# Altium PCB pcb_2Layer.PcbDoc
Units mm, origin at the board's own origin, x right, y up, seen from the top; angles counter-clockwise.
Board outline 113 x 60 mm, 2 copper layers (Top Layer, Bottom Layer), stack 1.576 mm thick; 38 components, 20 nets, 113 pads, 0 vias.
Unrouted connection lines stored in the file: 79.
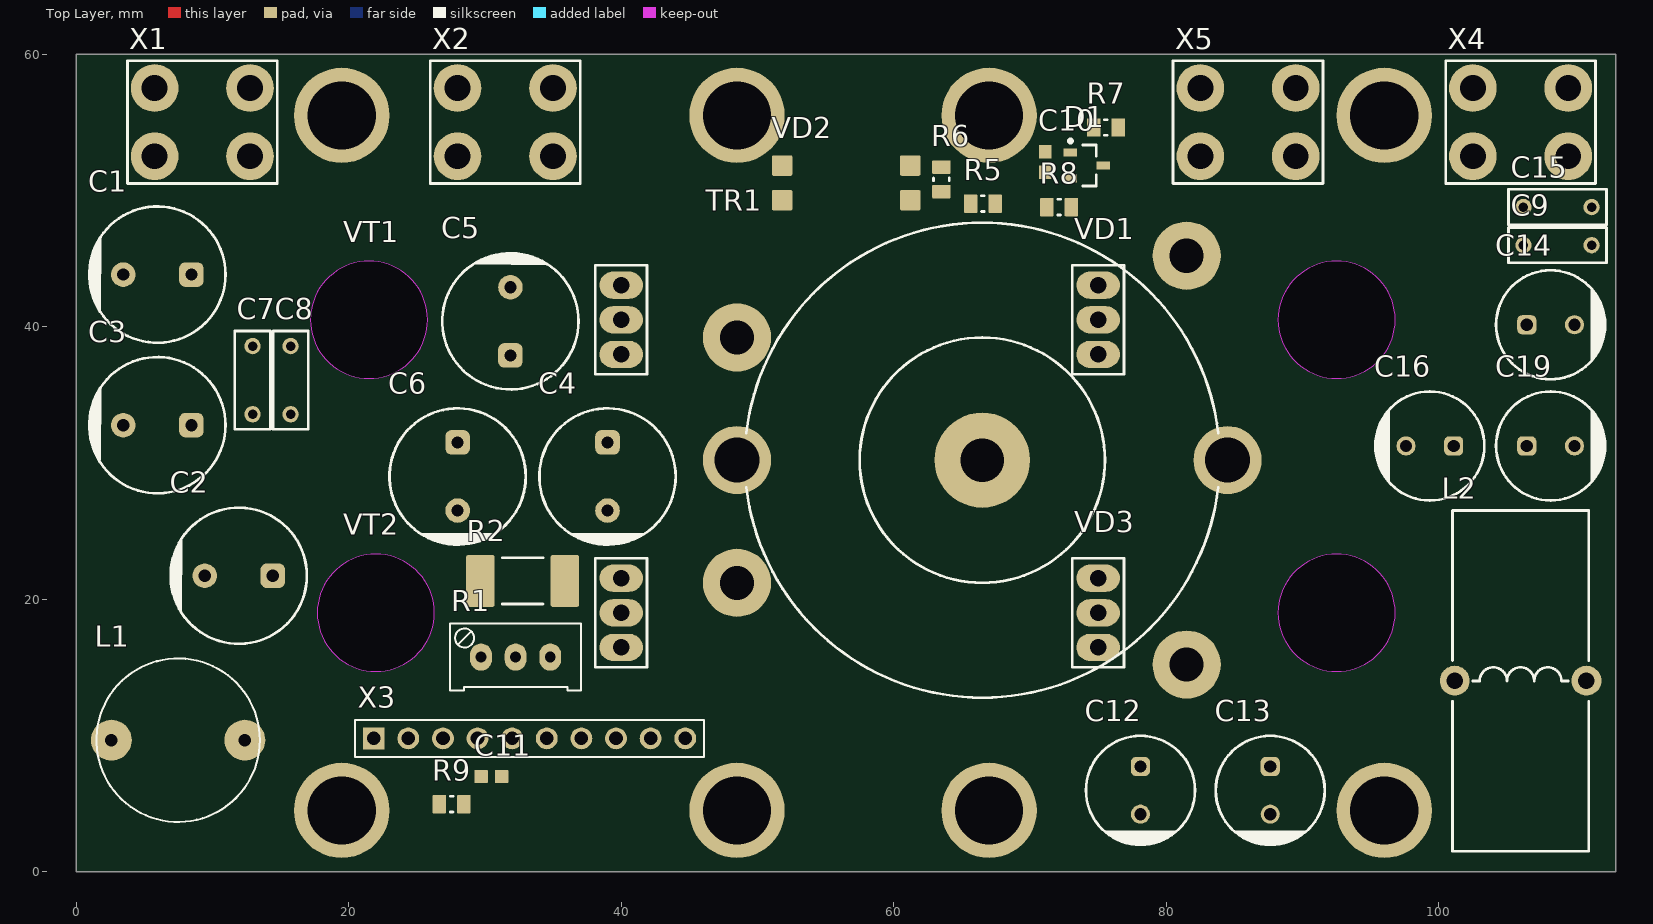
[diagram p0: Top Layer view]
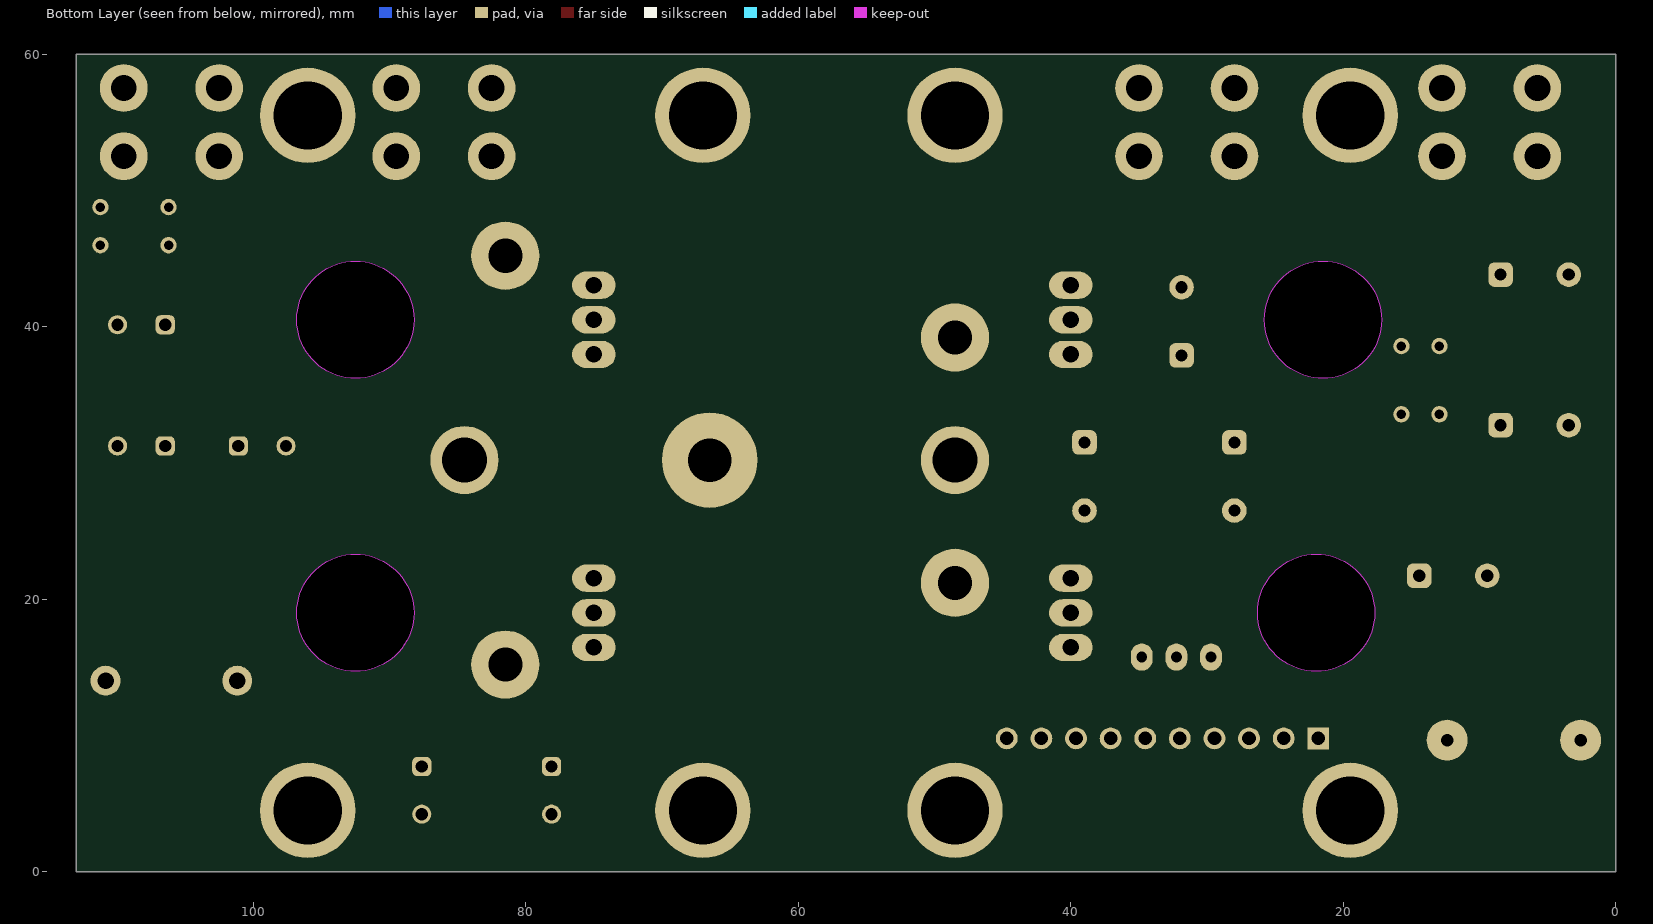
[diagram p1: Bottom Layer view, seen from below]

## Layer stack, top to bottom
Top Solder: solder mask 0.012, Solder Resist, Dk 3.5
Top Layer: signal copper 0.038
Dielectric 1: dielectric 1.5, FR-4, Dk 4.8
Bottom Layer: signal copper 0.038
Bottom Solder: solder mask 0.012, Solder Resist, Dk 3.5

## Board outline
0,0 0,60 113,60 113,0
cut-out: 17.199,40.5 ccw(c21.5,40.5) 21.5,36.199 ccw(c21.5,40.5) 25.801,40.5 ccw(c21.5,40.5) 21.5,44.801 ccw(c21.5,40.5)
cut-out: 17.699,19 ccw(c22,19) 22,14.699 ccw(c22,19) 26.301,19 ccw(c22,19) 22,23.301 ccw(c22,19)
cut-out: 88.199,19 ccw(c92.5,19) 92.5,14.699 ccw(c92.5,19) 96.801,19 ccw(c92.5,19) 92.5,23.301 ccw(c92.5,19)
cut-out: 88.199,40.5 ccw(c92.5,40.5) 92.5,36.199 ccw(c92.5,40.5) 96.801,40.5 ccw(c92.5,40.5) 92.5,44.801 ccw(c92.5,40.5)

## Design rules (kind name [scope] priority, off if disabled: settings)
BoardOutlineClearance [All] p1: gap=0.5 ignorepadtopadclearanceinfootprint=FALSE
Clearance MiddleVoltage [InNetClass('MiddleVoltage')] p1: gap=0.5 ignorepadtopadclearanceinfootprint=FALSE except(0: Arc-Hole Track-Hole SMDPad-Hole THPad-Hole Via-Hole Fill-Hole Poly-Hole Region-Hole Text-Hole; 0.2: Arc-Text Track-Text SMDPad-Text THPad-Text Via-Text Fill-Text Poly-Text Region-Text Text-Text)
Clearance HighVoltage [InNetClass('HighVoltage')] p2: gap=1 ignorepadtopadclearanceinfootprint=FALSE except(0: Arc-Hole Track-Hole SMDPad-Hole THPad-Hole Via-Hole Fill-Hole Poly-Hole Region-Hole Text-Hole; 0.2: Arc-Text Track-Text SMDPad-Text THPad-Text Via-Text Fill-Text Poly-Text Region-Text Text-Text)
Clearance Standart [All] p3: gap=0.2 ignorepadtopadclearanceinfootprint=FALSE except(0: Arc-Hole Track-Hole SMDPad-Hole THPad-Hole Via-Hole Fill-Hole Poly-Hole Region-Hole Text-Hole)
ComponentClearance [All] p1: gap=0.1 collisioncheckmode=3 verticalgap=0.1 showdistances=TRUE
Height [All] p1: minheight=0 maxheight=40 prefheight=12.7
HoleSize [All] p1: absolutevalues=TRUE maxlimit=12 minlimit=0.3 maxpercent=80.000 minpercent=20.000
HoleToHoleClearance [All] p1: gap=0.3 allowstackedmicrovias=TRUE
MinimumSolderMaskSliver [All] p1: minsoldermaskwidth=0.1
NetAntennae [All] p1: netantennaetolerance=2
PlaneClearance [All] p1: clearance=0.3
PlaneConnect PlaneConnectMiddleCurrent [InNetClass('MiddleCurrent')] p1: planeconnectstyle=Relief reliefexpansion=0.508 reliefentries=4 reliefconductorwidth=0.5 reliefairgap=0.3
PlaneConnect PlaneHighCurrent [InNetClass('HighCurrent')] p2: planeconnectstyle=Relief reliefexpansion=0.508 reliefentries=4 reliefconductorwidth=0.5 reliefairgap=0.35
PlaneConnect [All] p3: planeconnectstyle=Relief reliefexpansion=0.508 reliefentries=4 reliefconductorwidth=0.3 reliefairgap=0.3
PolygonConnect PolygonConnectMiddleCurrent [All vs InNetClass('MiddleCurrent')] p1: connectstyle=Relief reliefconductorwidth=0.4 reliefentries=4 polygonreliefangle="90 Angle" airgapwidth=0.3
PolygonConnect PolygonHighCurrent [InNetClass('HighCurrent')] p2: connectstyle=Relief reliefconductorwidth=0.5 reliefentries=4 polygonreliefangle="90 Angle" airgapwidth=0.3
PolygonConnect PolygonConnect_Keepout [(ObjectKind = 'Track') And (Layer = 'KeepOutLayer')] p3: connectstyle=Direct reliefconductorwidth=0.254 reliefentries=4 polygonreliefangle="90 Angle" airgapwidth=0.254
PolygonConnect PolygonConnect_Via [IsVia] p4: connectstyle=Direct reliefconductorwidth=0.254 reliefentries=4 polygonreliefangle="90 Angle" airgapwidth=0.254
PolygonConnect [All] p5: thpad.connectstyle=Relief thpad.reliefconductorwidth=0.3 thpad.reliefentries=4 thpad.polygonreliefangle="90 Angle" thpad.airgapwidth=0.25 smdpad.connectstyle=Relief smdpad.reliefconductorwidth=0.3 smdpad.reliefentries=4 smdpad.polygonreliefangle="90 Angle" smdpad.airgapwidth=0.25 via.connectstyle=Direct via.reliefconductorwidth=0.3 via.reliefentries=4 via.polygonreliefangle="90 Angle" via.airgapwidth=0.3
RoutingCorners [All] p1: cornerstyle=45-Degree minsetback=1 maxsetback=3
RoutingVias Power [InNetClass('Power')] p1: holewidth=0.8 width=1.5 viastyle="Through Hole" minholewidth=0.5 minwidth=1 maxholewidth=1.2 maxwidth=3
RoutingVias [All] p2: holewidth=0.4 width=0.8 viastyle="Through Hole" minholewidth=0.3 minwidth=0.6 maxholewidth=0.5 maxwidth=1
SilkToSilkClearance [All] p1: silktosilkclearance=0
SilkToSolderMaskClearance [IsPad] p1: minsilkscreentomaskgap=0.05 clearancetoexposedcopper=TRUE
SolderMaskExpansion SolderMaskExpansion_VIA [IsVia] p1: expansion=-3 istentingtop=TRUE useseparateexpansions=TRUE expansionbottom=-3 istentingbottom=TRUE
SolderMaskExpansion [All] p2: expansion=0.05 istentingtop=FALSE
SupplyNets "Schematic Supply Nets_7" [InNet('GND16')] p1: voltage=0.000
SupplyNets "Schematic Supply Nets_6" [InNet('+VBAT')] p2: voltage=0.000
SupplyNets "Schematic Supply Nets_5" [InNet('5VREF')] p3: voltage=0.000
SupplyNets "Schematic Supply Nets_2" [InNet('GND')] p4: voltage=0.000
Width Width_ANT [InNetClass('Anthenna')] p1: maxlimit=1.641 minlimit=0.2 preferedwidth=1.641
Width WidthMiddleCurrent [InNetClass('MiddleCurrent')] p2: maxlimit=2 minlimit=0.35 preferedwidth=0.5
Width WidthHighCurrent [InNetClass('HighCurrent')] p3: maxlimit=5 minlimit=0.5 preferedwidth=1
Width [All] p4: maxlimit=0.5 minlimit=0.2 preferedwidth=0.25
19 further rules are at their usual default settings.

## Components (designator, comment, footprint, x,y, rotation, side; value= is the part's Value field where it differs from the comment)
C1 "1000uFx25V" CAP-AE-PTH-100D05x200H20 5.969,43.815 r180 top value=1000uF
C2 "1000uFx25V" CAP-AE-PTH-100D05x200H20 11.938,21.717 r180 top value=1000uF
C3 "1000uFx25V" CAP-AE-PTH-100D05x200H20 5.969,32.766 r180 top value=1000uF
C4 "1000uFx25V" CAP-AE-PTH-100D05x200H20 39,29 r270 top value=1000uF
C5 "1000uFx25V" CAP-AE-PTH-100D05x200H20 31.877,40.386 r90 top value=1000uF
C6 "1000uFx25V" CAP-AE-PTH-100D05x200H20 28,29 r270 top value=1000uF
C7 "*uF" "CAP: MKS2 (W=2.50MM)" 12.954,36.068 r90 top value=0.1uF
C8 "*uF" "CAP: MKS2 (W=2.50MM)" 15.748,36.068 r90 top value=0.1uF
C9 "*uF" "CAP: MKS2 (W=2.50MM)" 108.712,45.974 r0 top value=0.1uF
C10 "0.1uF" C_CERAMIC_0603_MED 71.12,52.07 r270 top
C11 "0.1uF" C_CERAMIC_0603_MED 30.48,6.985 r0 top
C12 "470uFx25V" CAP-AE-PTH-80D05x130H15 78.105,5.969 r270 top value=470uF
C13 "470uFx25V" CAP-AE-PTH-80D05x130H15 87.63,5.969 r270 top value=470uF
C14 "470uFx25V" CAP-AE-PTH-80D05x130H15 108.204,40.132 r0 top value=470uF
C15 "*uF" "CAP: MKS2 (W=2.50MM)" 108.712,48.768 r0 top value=0.1uF
C16 "470uFx25V" CAP-AE-PTH-80D05x130H15 99.342,31.242 r180 top value=470uF
C19 "470uFx25V" CAP-AE-PTH-80D05x130H15 108.204,31.242 r0 top value=470uF
D1 "TL431ACDBZR" SOT-23_MED 74.168,51.816 r0 top
L1 "3.3uH" DROD0625V-18-1.12 7.493,9.652 r0 top value="3.3 uH"
L2 "15uH" "IND: R22.9/14/7.62 (H)" 106,14 r0 top value="15 uH"
R1 "10k" 3296W-1-xxx 32.258,15.748 r270 top
R2 "30mOhm" CRA2512-Series 32.766,21.336 r180 top value=0.03
R5 "1k" R_ANY_CHIP_0805_MED 66.548,49.022 r0 top
R6 "1k" R_ANY_CHIP_0805_MED 63.5,50.8 r270 top
R7 "22" R_ANY_CHIP_0805_MED 75.576,54.61 r0 top value=10k
R8 "2k7" R_ANY_CHIP_0805_MED 72.136,48.768 r180 top
R9 "1k" R_ANY_CHIP_0805_MED 27.559,4.953 r0 top
TR1 "TR" "TR: R32.8/20.1/10.7 (L) - MidPoint - 2" 66.5,30.198 r0 top
VD1 "DIODE SCHOTTKY" TO220(H) 75,40.5 r270 top
VD2 "LTV-817S-TA1" LTV-817S-TA1_REC 56.514,50.546 r90 top
VD3 "DIODE SCHOTTKY" TO220(H) 75,19 r270 top
VT1 "AOD403" TO220(H) 40,40.5 r90 top locked
VT2 "AOD403" TO220(H) 40,19 r90 top locked
X1 "Power connector, *, *" "CON: 8191" 9.271,55 r90 top
X2 "Power connector, *, *" "CON: 8191" 31.496,55 r90 top
X3 "PLS-10 (Part of PLS-40)" DS1021-10S 33.274,9.779 r0 top
X4 "Power connector, *, *" "CON: 8191" 106,55 r90 top
X5 "Power connector, *, *" "CON: 8191" 86,55 r90 top

## Footprints (in the part's own frame and the unit in brackets; to place one, negate y for a bottom-side part, rotate by r counter-clockwise, add the part's x,y. Pads: shape width x height; smd on the part's side, far side on the other; paste and mask are expansions set on the pad)
3296W-1-xxx [mm] "Square Trimpot Trimming Potentiometer"
  oval 2x1.6 hole 0.8 mask+0.05: 1(0,-2.54) 2(0,0) 3(0,2.54)
  silkscreen extent -2.45,-4.8 2.45,4.8, body extent -2.45,-4.76 2.38,4.76, height 11.6
C_CERAMIC_0603_MED [mm] "Chip Capacitor, 2-Leads, Body 1,60x0,80mm, IPC Medium Density"
  rrect15% 1x0.95 smd mask+0.05: 1(-0.75,0) 2(0.75,0)
  Top Layer pour cut-out: -0.05,0.45 0.05,0.45 0.05,-0.45 -0.05,-0.45
  body extent -0.9,-0.5 0.9,0.5, height 0.9
CAP-AE-PTH-80D05x130H15 [mm] "PTH Aluminium Electrolytic Capacitor, Diameter 8mm, Height 13mm"
  rrect50% 1.4x1.4 hole 0.9: 1(-1.75,0)
  round 1.4 hole 0.9: 2(1.75,0)
  silkscreen extent -4,-4 4.03,4, body extent -4.25,-4.25 4.25,4.25, height 14.5
CAP-AE-PTH-100D05x200H20 [mm] "PTH Aluminium Electrolytic Capacitor, Diameter 10mm, Height 20mm"
  rrect50% 1.8x1.8 hole 0.9: 1(-2.5,0)
  round 1.8 hole 0.9: 2(2.5,0)
  silkscreen extent -5,-5 5,5, body extent -5.25,-5.25 5.25,5.25, height 22
"CAP: MKS2 (W=2.50MM)" [mm]
  round 1.2 hole 0.7: 1(-2.5,0) 2(2.5,0)
  silkscreen extent -3.6,-1.3 3.6,1.3, body extent -3.6,-1.25 3.6,1.25, height 6.5
"CON: 8191" [mm]
  round 3.5 hole 1.9: 1(-2.5,3.5) 1(-2.5,-3.5) 1(2.5,3.5) 1(2.5,-3.5)
  silkscreen extent -4.5,-5.5 4.5,5.5, body extent -4,-4 4,4, height 7.05
CRA2512-Series [mm]
  rrect15% 2.1x3.8 smd mask+0.05: 1(-3.1,0) 2(3.1,0)
  silkscreen extent -1.5,-1.7 1.5,1.7, body extent -3.22,-1.68 3.23,1.68, height 0.7
DROD0625V-18-1.12 [mm] "Дросель з магазину Coretech"
  round 3 hole 0.914 paste-2539.97 mask+0: 1(-4.896,0) 2(4.896,0)
  silkscreen extent -6,-6 6,6
DS1021-10S [mm] "2.54mm 10-pin One Row Male Header, PLS-10"
  rect 1.6x1.6 hole 1: 1(-11.43,0)
  round 1.6 hole 1: 2(-8.89,0) 3(-6.35,0) 4(-3.81,0) 5(-1.27,0) 6(1.27,0) 7(3.81,0) 8(6.35,0) 9(8.89,0) 10(11.43,0)
  silkscreen extent -12.8,-1.35 12.8,1.35, body extent -12.7,-1.27 12.7,1.27, height 8.64
"IND: R22.9/14/7.62 (H)" [mm]
  round 2.2 hole 1.2: 1(-4.83,0.015) 2(4.83,0.015)
  silkscreen extent -5,-12.5 5,12.5, body extent -4.83,-12.47 4.83,12.47, height 24.77
LTV-817S-TA1_REC [mm] "SMD Optocoupler 5kV"
  rrect15% 1.5x1.5 smd: 1(-1.27,-4.7) 2(1.27,-4.7) 3(1.27,4.7) 4(-1.27,4.7)
  body extent -2.31,-5.09 2.29,5.07, height 3.76
R_ANY_CHIP_0805_MED [mm] "Chip Resistor, 2-Leads, Body 2,00x1,25mm, IPC Medium Density"
  rrect15% 1x1.35 smd: 1(-0.9,0) 2(0.9,0)
  silkscreen extent -0.1,-0.58 0.1,0.58, body extent -1,-0.67 1,0.68, height 0.6
SOT-23_MED [mm] "SOT23, 3-Leads, Body 2,92x2,37mm, Pitch 0,95mm, IPC Medium Density"
  rrect15% 1x0.6 smd: 1(-1.2,0.95) 2(-1.2,-0.95) 3(1.2,0)
  silkscreen extent -1.32,-1.5 0.7,1.92, body extent -1.32,-1.52 1.32,1.52, height 1.12
TO220(H) [mm]
  oval 2x3.2 hole 1.2: 1(-2.54,0) 2(0,0) 3(2.54,0)
  silkscreen extent -4,-1.9 4,1.9, body extent -4.95,-0.37 4.95,20.67, height 2.76
"TR: R32.8/20.1/10.7 (L) - MidPoint - 2" [mm]
  round 5 hole 2.5: 1(-18,9) 2(-18,-9) 4(15,15) 5(15,-15)
  round 5 hole 3.3: 3(-18,0) 6(18,0)
  round 7 hole 3.2: ""(0,0)
  silkscreen extent -17.31,-17.43 17.31,17.43, body extent -17.43,-17.4 17.43,17.4, height 12.84

## Part data
C1 C2 C3 C4 C5 C6: library part ESH108M025AH4AA, "1000uF 25V ±20% Aluminum Electrolytic Capacitors Radial, 2000 Hrs @ 105°C, 740mA Ripple Current", Dielectric Type=NONE, Manufacturer=Kemet, Package=D10x20mm, Supplier Part Number 1=80-ESH108M025AH4AA, Temperature Range="-40°C ~ 105°C", Tolerance=±20%, Voltage=25V, Ajax_1C_PN=NONE, Ajax_1С_Status="RND Only", Component Status=Released, Component Type=PTH, ComponentLink1Description=Datasheet, ComponentLink1URL=https://eu.mouser.com/datasheet/2/212/KEM_A4005_ESH-1101279.pdf, Part Number=ESH108M025AH4AA, Part Type=Aluminum, Price=NONE, Replacement=NONE, Standard Lead Time="30 Weeks", Supplier 1=Mouser
C7 C8 C9 C15: library part CAP_NON_POLAR_THT, "Multilayer Ceramic Capacitors MLCC - SMD/SMT 10 uF 25 VDC 10% 1206 X7R", Manufacturer=Murata, Package=1206, Part Number=GRM31CR71E106KA12L, Tolerance="10 %", Voltage=25V, Component Type=THT, ComponentLink1Description=Datasheet, ComponentLink1URL=https://eu.mouser.com/datasheet/2/281/1/GRM31CR71E106KA12_01CA-1987921.pdf
C10 C11: library part CL10B104KB8NNNC, "100nF 50V X7R ±10% 0603 Ceramic Capacitor RoHS", Dielectric Type=X7R, Manufacturer="Samsung Electro-Mechanics", Package=0603, Supplier Part Number 1=1276-1000-2-ND, Temperature Range="-55°C ~ 125°C", Tolerance=±10%, Voltage=50V, Ajax_1C_ID=15653, Ajax_1C_PN="100nF 50V X7R 10% 0603 CL10B104KB8NNNC ceramic capacitor SMD", Ajax_1С_Status="Mass Production", Component Status=Released, Component Type=SMD, ComponentLink1Description=Datasheet, ComponentLink1URL=https://media.digikey.com/pdf/Data%20Sheets/Samsung%20PDFs/CL_Series_MLCC_ds.pdf, GUID_1C=28d36f8f-5d05-11e9-ab4e-0050569f2651, Part Number=CL10B104KB8NNNC, Part Type="Ceramic / X7R / 0603", Price=0.00273, Replacement=CL10B104KB8NNND, Standard Lead Time="18 Weeks", Supplier 1=Digi-Key
C12 C13 C14 C16 C19: library part KS-025V471MF130, "470uF 25V ±20% D8x13mm Conductive Polymer Aluminum Solid Capacitor, 2000 Hrs @ 105°C, 4100mA Ripple Current", Dielectric Type=NONE, Manufacturer=Koshin, Package=D8x13mm, Temperature Range="-55°C ~ 105°C", Tolerance=±20%, Voltage=25V, Ajax_1C_ID=45913, Ajax_1C_PN="470uF 25V 20% Low ESR 8x13mm (KS-025V471MF130 - Koshin) Aluminium Capacitors", Ajax_1С_Status="Mass Production", Component Status=Released, Component Type=PTH, ComponentLink1Description=Datasheet, ComponentLink1URL=\\altiumdb.ajax.local\files\Datasheet\Capacitor\KS-Series.pdf, GUID_1C=2652f362-010b-11ed-a361-005056994834, Part Number=KS-025V471MF130, Part Type=Aluminum, Price=0.07, Replacement=NONE
D1: "Adjustable Precision Shunt Regulator, Accuracy 1%,  SOT-23-3", Manufacturer="Texas Instruments", Package=SOT-23, Supplier Part Number 1=296-17328-1-ND, Temperature Range="0°C ~ 70°C", Ajax_1C_ID=6287, Ajax_1C_PN="TL431ACDBZR (SOT-23)", Ajax_1С_Status="Mass Production", Component Status=Released, Component Type=SMD, ComponentLink1Description=Datasheet, ComponentLink1URL=https://www.ti.com/lit/ds/symlink/tl431.pdf, GUID_1C=b426e85d-df70-11e4-9f89-a45d36c4a9e5, Part Number=TL431ACDBZR, Part Type="Voltage Reference", Price=0.046, Replacement=NONE, Standard Lead Time="8 Weeks", Supplier 1=Digi-Key
L1: library part DROD0625V-18-1.12, "Дросель з магазину Coretech", Current=11.3A, Manufacturer="Bourns Inc.", Package=THT, Part Number=RLB0914-3R3ML-ND, Tolerance=±20%, ComponentLink1Description=Datasheet, ComponentLink1URL=https://www.vishay.com/docs/34193/ihlp-4040dz-01.pdf, Saturation Current=11.3A
L2: library part IND_TOROIDAL, Current=11.3A, Manufacturer="Bourns Inc.", Package=THT, Part Number=RLB0914-3R3ML-ND, Saturation Current=14.4, Tolerance=±20%, ComponentLink1Description=Datasheet, ComponentLink1URL=https://www.vishay.com/docs/34193/ihlp-4040dz-01.pdf
R1: library part 3296W-1-103LF, "10 kOhms ±10% Trimmer Resistor, 0.5W, Through Hole 3/8\", 4.83x9.53mm, 10.03mm Height", Manufacturer=Bourns, Package=4.83x9.53mm, Power Rating=0.5W, Supplier Part Number 1=652-3296W-1-103LF, Temperature Range="-55°C ~ 125°C", Temperature Stability=±100ppm/°C, Tolerance=±10%, Ajax_1C_ID=93647, Ajax_1C_PN="3296W-1-103LF 10k 10% потенціометр Bourns", Ajax_1С_Status="RND Only", Component Status=Released, Component Type=PTH, ComponentLink1Description=Datasheet, ComponentLink1URL=https://www.bourns.com/data/global/pdfs/3296.pdf, GUID_1C=97641684-c416-11ee-b96d-00505699fadc, Part Number=3296W-1-103LF, Part Type="Trimming Potentiometer", Price=0.17925015, Replacement=NONE, Supplier 1=Mouser
R2: library part CRA2512-FZ-R030ELF, "30 mOhms ±1%, 3W 2512 Metal Strip Current Sense Chip Resistor", Manufacturer=Bourns, Package=2512, Power Rating=3W, Supplier Part Number 1=652-CRA2512FZR030ELF, Temperature Range="-55°C ~ 170°C", Temperature Stability=±50ppm/°C, Tolerance=±1%, Voltage=NONE, Ajax_1C_ID=49526, Ajax_1C_PN="0.03R 1% 3W 2512 50ppm CRA2512-FZ-R030ELF Bourns Metal Strip Current Sense Resistors SMD RoHS", Ajax_1С_Status="RND Only", Component Status=Released, Component Type=SMD, ComponentLink1Description=Datasheet, ComponentLink1URL=https://eu.mouser.com/datasheet/2/54/cra-1862173.pdf, GUID_1C=1387118b-2e85-11ed-a363-005056994834, Part Number=CRA2512-FZ-R030ELF, Part Type="Metal Element, Strip", Price=0.199, Replacement=NONE, Supplier 1=Mouser
R5 R6 R7 R8 R9: library part RC0805JR-0722RL, "22 Ohms ±5%, 1/8W 0805 Thick Film Resistor", Manufacturer=Yageo, Package=0805, Power Rating=0.125W, Temperature Range="-55°C ~ 155°C", Temperature Stability=±100ppm/°C, Tolerance=±5%, Voltage=150V, Ajax_1C_ID=8822, Ajax_1C_PN="22R 5% 0805 Resistors SMD RoHS", Ajax_1С_Status="Mass Production", Component Status=Released, Component Type=SMD, ComponentLink1Description=Datasheet, ComponentLink1URL=https://eu.mouser.com/datasheet/2/447/PYu_RC_Group_51_RoHS_L_10-1664068.pdf, GUID_1C=3ba40fec-5951-11e6-81ec-d8cb8a9acc66, Part Number=RC0805JR-0722RL, Part Type="Thick Film", Price=0.0011, Replacement=NONE
TR1: library part "Toroidal Transformator Midpoint_1", Manufacturer=Handmade, Part Number=RLB0914-3R3ML-ND, Saturation Current=11.3A, Tolerance=±20%, ComponentLink1Description=Datasheet, ComponentLink1URL=https://www.vishay.com/docs/34193/ihlp-4040dz-01.pdf
VD1 VD3: "Diode Schottky Array 1 Pair Common Cathode, 120V 20A, TO-220", Current=20A, Manufacturer=STMicroelectronics, Package=TO-220AB, Part Number=STPS20SM120ST, Supplier Part Number 1=497-15563-5-ND, Temperature Range="-65°C ~ 150°C", Voltage=120V, Component Status=Released, Component Type=PTH, ComponentLink1Description=Datasheet, ComponentLink1URL=https://www.st.com/resource/en/datasheet/stps20sm120s.pdf, Marking=STPS20SM120, Part Type=Schottky, Price=NONE, Replacement=NONE, Standard Lead Time="11 Weeks", Supplier 1=Digi-Key, Vf="0.75V @ 10A"
VD2: "1-Channel Photocoupler, 5kV, SSOP-4", Color=NONE, Manufacturer="Lite-On Optoelectronics", Package=SSOP-4, Supplier Part Number 1=160-1893-2-ND, Temperature Range="-55°C ~ 110°C", Ajax_1C_ID=12260, Ajax_1C_PN="LTV-817S-TA1 оптопара", Ajax_1С_Status="Mass Production", Component Status=Released, Component Type=SMD, ComponentLink1Description=Datasheet, ComponentLink1URL=https://optoelectronics.liteon.com/upload/download/DS-70-96-0016/LTV-8X7%20series%20201610%20.pdf, GUID_1C=36a51d61-3103-11e8-822a-14dda9d2d04d, Part Number=LTV-817S-TA1, Part Type=Optocoupler, Price=0.053, Replacement=LTV-816S-TA1, Supplier 1=Digi-Key, Wavelength=NONE
VT1 VT2: library part N-CH_MOSFET, "P-MOSFET; полевой; -30В; -55А; 45Вт; TO252", Package=D-PAK, Component Type=SMD, ComponentLink1Description=Datasheet, ComponentLink1URL=https://www.tme.eu/Document/dd9e9fcbccf7c5b1f5f9da06cbc5bf44/AOD403-DTE.pdf, ComponentLink2Description=imrad, ComponentLink2URL=https://imrad.com.ua/ua/aod403-7?srsltid=AfmBOoqbv76D2b_UWMskTCTCmXEIhcjdT6a5VOgt9k0M-VKdEIqWTw9d, Id=-55А, Part Number=AOD403, Part Type=P-Channel, RDS=8mR, Vds=-30V
X1 X2 X4 X5: library part Connector_single_power, TypeConnector="Power connector", ValueManufacturerPartNumber="Power connector, *, *"
  X1 X4: CommentText=+
  X2 X5: CommentText=-
X3: library part DS1021-10SF11, "10 Pin 2.54mm Male Header, Vertical, 3mm and 6.1mm, PLS-5", Manufacturer=Connfly, Temperature Range="-40°C ~ 105°C", Ajax_1C_ID=1215, Ajax_1C_PN="PLS40, планки со штырьками", Ajax_1С_Status="Mass Production", Component Status=Released, Component Type=PTH, ComponentLink1Description=Datasheet, ComponentLink1URL=\\altiumdb.ajax.local\files\Datasheet\Connectors\DS1021.pdf, Part Number=DS1021-10SF11, Part Type="Header / Male Pin / Single Row", Price=0.001875, Replacement=NONE

## Free pads (board coordinates)
  round 7 hole 5: 1(19.5,4.5) 1(19.5,55.5) 1(48.5,4.5) 1(48.5,55.5) 1(67,4.5) 1(67,55.5) 1(96,4.5) 1(96,55.5)

## Nets (pads, with @x,y where several pads share a name; then routed paths per layer and width w, separated by ;. In a path a pad name is that pad's centre, name@x,y a point inside that pad or via, vN(x,y) a via of type N, cw(c..) or ccw(c..) an arc to the next point about the centre after c; other vN are vias at no path point)
5VREF: R9.2 X3.8
+VBAT: C2.1 C4.1 C5.1 C6.1 C7.1 C8.1 L1.2 TR1.3 X3.1
cEN: X3.2
COMP: R9.1 VD2.4 X3.3
G1: VT1.1 X3.6
G2: VT2.1 X3.7
GND: C1.2 C2.2 C3.2 C4.2 C5.2 C6.2 C7.2 C8.2 C11.2 R1.1 R2.2 VD2.3 X2.1 X3.5 X3.9 X3.10
GND16: C9.2 C12.2 C13.2 C14.2 C15.2 C16.2 C19.2 D1.3 R8.1 TR1.6 X4.1
NetC1_1: C1.1 C3.1 L1.1 X1.1
NetC9_1: C9.1 C14.1 C15.1 C16.1 C19.1 L2.2 R5.2 R7.2 X5.1
NetC10_1: C10.1 D1.1 R6.1 VD2.2
NetC10_2: C10.2 D1.2 R7.1 R8.2
NetC12_1: C12.1 C13.1 L2.1 VD1.2 VD3.2
NetR1_3: R1.3 R2.1 VT1.3 VT2.3
NetR5_1: R5.1 R6.2 VD2.1
NetTR1_1: TR1.1 VT1.2
NetTR1_2: TR1.2 VT2.2
NetTR1_4: TR1.4 VD1.1 VD1.3
NetTR1_5: TR1.5 VD3.1 VD3.3
SHDN: C11.1 R1.2 X3.4
pads on no net: TR1.

## Silkscreen, mask and mechanical layers (free items; w line width, h text height)
Board:
  circle w0.254: c21.5,40.5 r4.301
  circle w0.254: c22,19 r4.301
  circle w0.254: c92.5,19 r4.301
  circle w0.254: c92.5,40.5 r4.301
  lines w0.254: 0,0 0,60 113,60 113,0 0,0
Top Assembly:
  lines w0.5: 9.5,0 52.5,0 52.5,60 9.5,60 9.5,0 ; 57,0 100,0 100,60 57,60 57,0
Title:
  lines w0.1: 198.8,199.4 266.75,199.4
  lines w0.127: -44.879,10.002 -39.799,10.002 ; -44.879,80.487 -39.799,80.487 ; -44.879,150.972 -39.799,150.972 ; 4.397,-60.483 4.397,-55.403 ; 4.397,216.377 4.397,221.457 ; 53.546,-60.483 53.546,-55.403 ; 53.546,216.377 53.546,221.457 ; 102.695,-60.483 102.695,-55.403 ; 102.695,216.377 102.695,221.457 ; 151.971,-60.483 151.971,-55.403 ; 151.971,216.377 151.971,221.457 ; 194.725,-55.375 194.725,-25.375 343.725,-25.375 ; 194.725,-50.375 343.725,-50.375 ; 194.725,-45.375 343.725,-45.375 ; 194.725,-35.375 343.725,-35.375 ; 201.12,-60.483 201.12,-55.403 ; 201.12,216.377 201.12,221.457 ; 209.725,-45.375 209.725,-35.375 ; 250.269,-60.483 250.269,-55.403 ; 250.269,216.377 250.269,221.457 ; 279.725,-55.375 279.725,-45.375 ; 299.545,-60.483 299.545,-55.403 ; 299.545,216.377 299.545,221.457 ; 328.725,-45.375 328.725,-35.375 ; 343.741,10.002 348.821,10.002 ; 343.741,80.487 348.821,80.487 ; 343.741,150.972 348.821,150.972 ; -44.879,-60.483 348.821,-60.483 348.821,221.457 -44.879,221.457 -44.879,-60.483 ; -39.799,-55.403 343.741,-55.403 343.741,216.377 -39.799,216.377 -39.799,-55.403
  text "1" at -20.842,218.028 h1.78
  text "2" at 28.197,218.028 h1.78
  text "3" at 77.456,218.028 h1.78
  text "4" at 126.749,218.028 h1.78
  text "5" at 176.025,218.028 h1.78
  text "6" at 225.047,218.028 h1.78
  text "7" at 274.577,218.028 h1.78
  text "8" at 323.599,218.028 h1.78
  text "NOTES: UNLESS OTHERWISE SPECIFIED." at 200.2,200.45 h2.5
  text "1. MATERIAL:BASE MATERIAL LAMINATED EPOXY GLASS (ANY COLOR)" at 200.35,194.4 h2.5
  text "GRADE NEMA FR-4. ALL SIDES 1 OZ COPPER PER MIL-P-13949." at 206.95,189.9 h2.5
  text "AND IS UL APPROVED MFR SOURCE WITH 1.6 mm +-10 PERCENT" at 206.95,186.2 h2.5
  text "A" at -42.974,184.043 h1.78
  text "A" at 345.646,184.043 h1.78
  text "2. SOLDER PLATE PER QQ-S-571." at 200.35,181.9 h2.5
  text "3. SILKSCREEN IS ABSENT." at 200.35,177.9 h2.5
  text "4. DIMENSIONS IN MILLIMETERS, (...) - FOR REFERENCE," at 200.3,173 h2.5
  text "TOLERANCE ARE: +-0.15; HOLES: +- 0.05." at 207.45,168.95 h2.5
  text "5. LIQUID PHOTO IMAGABLE SOLDERMASK ENTHRONE DSR3241" at 200.35,164.9 h2.5
  text "OR ALTERNATIVE." at 207.45,160.95 h2.5
  text "6.  FOR REF ONLY: THIS BOARD HAS SMD ON BOTH SIDES." at 200.35,156.9 h2.5
  text "7.  THE FINISH OF THE BOARD IS HASL." at 200.2,150.5 h2.5
  text "8. PCB stackup:" at 200.2,144.8 h2.5
  text "B" at -42.974,113.431 h1.78
  text "B" at 345.646,113.431 h1.78
  text "C" at -42.974,42.819 h1.78
  text "C" at 345.646,42.819 h1.78
  text "D" at -42.974,-27.285 h1.78
  text "D" at 345.646,-27.285 h1.78
  text "TITLE:" at 195.7,-27.8 h1.2
  text "SIZE:" at 195.7,-37.55 h1.2
  text "DWG NO:" at 210.7,-37.55 h1.2
  text "REV:" at 330.2,-37.55 h1.2
  text ".Project_Version" at 335.4,-38.7 h2.5
  text "A3" at 201.7,-42.3 h2.5
  text "DATE:" at 195.7,-47.55 h1.2
  text "PCB DESIGNER:" at 281.2,-47.55 h1.2
  text ".PRINT_DATE" at 209.2,-48.8 h2.5
  text "FILE NAME:" at 195.7,-52.55 h1.2
  text "SHEET:" at 280.95,-52.55 h1.2
  text ".PCB_FILE_NAME_NO_PATH" at 209.2,-53.8 h2.5
  text "1 OF 1" at 298.95,-54.05 h2.5
  text "1" at -20.842,-58.832 h1.78
  text "2" at 28.197,-58.832 h1.78
  text "3" at 77.456,-58.832 h1.78
  text "4" at 126.749,-58.832 h1.78
  text "5" at 176.025,-58.832 h1.78
  text "6" at 225.047,-58.832 h1.78
  text "7" at 274.577,-58.832 h1.78
  text "8" at 323.599,-58.832 h1.78

## Dimensions
0,60 to 0,0 on Dimensions
0,60 to 113,0 on Dimensions

## Text inside footprints (layer, text, board x,y; h text height)
C1: Top Assembly "+" at 8.769,45.715 h0.9 r180
C2: Top Assembly "+" at 14.738,23.617 h0.9 r180
C3: Top Assembly "+" at 8.769,34.666 h0.9 r180
C4: Top Assembly "+" at 37.1,31.8 h0.9 r270
C5: Top Assembly "+" at 33.777,37.586 h0.9 r90
C6: Top Assembly "+" at 26.1,31.8 h0.9 r270
C12: Top Assembly "+" at 79.305,8.119 h0.9 r270
C13: Top Assembly "+" at 88.83,8.119 h0.9 r270
C14: Top Assembly "+" at 106.054,41.332 h0.9
C16: Top Assembly "+" at 101.492,30.042 h0.9 r180
C19: Top Assembly "+" at 106.054,32.442 h0.9